# Altium PCB Fingerprint_Mechanism_PCB_V2.0.PcbDoc
Units mil, origin at the board's own origin, x right, y up, seen from the top; angles counter-clockwise.
Board outline 1800 x 4000 mil, 2 copper layers (Top Layer, Bottom Layer); 33 components, 22 nets, 111 pads, 13 vias.
Unrouted connection lines stored in the file: 1.
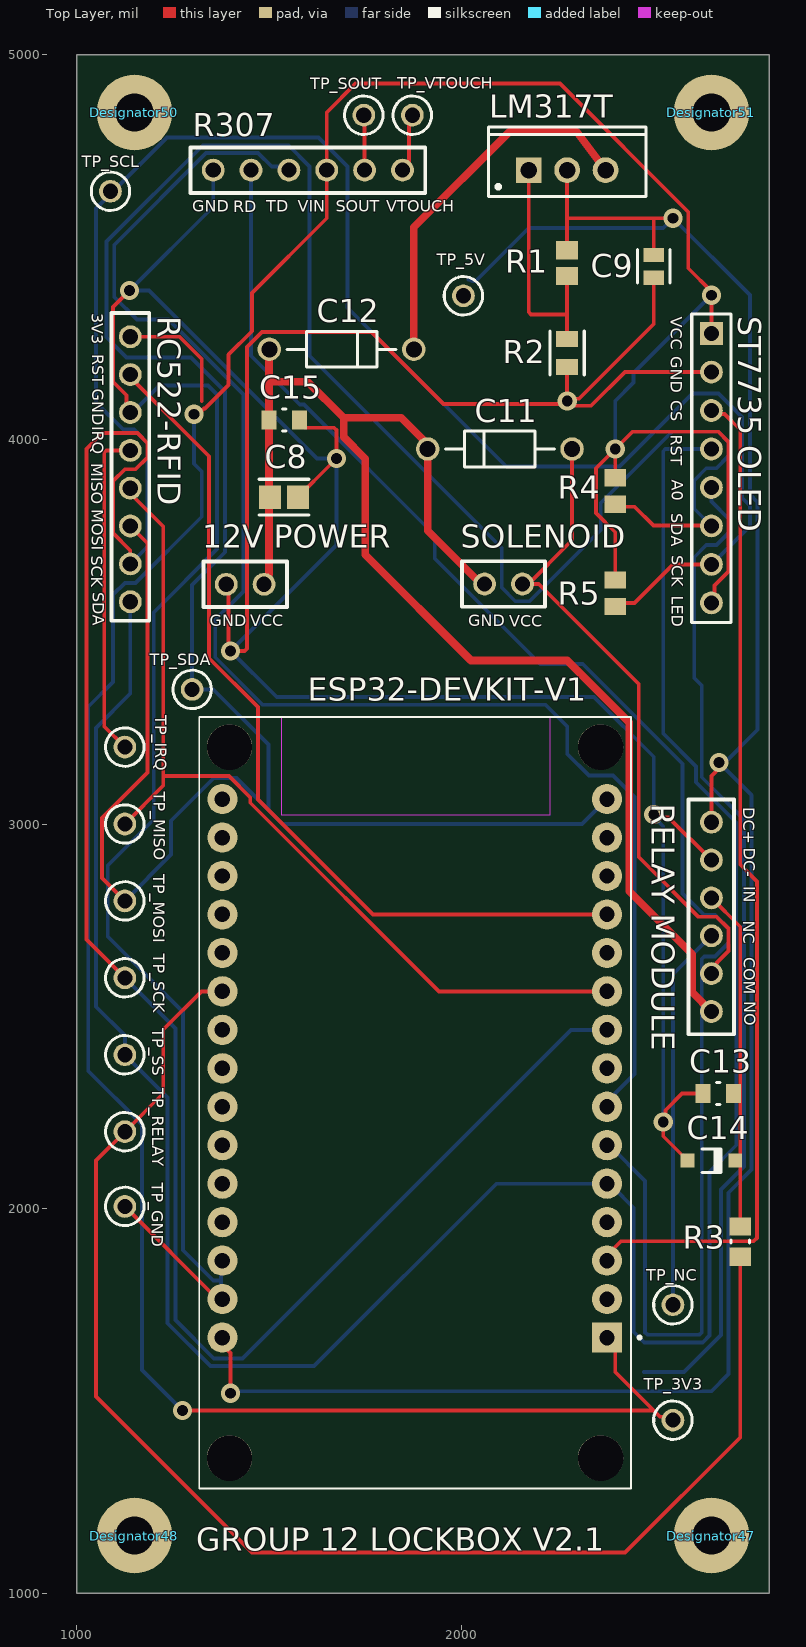
[diagram p0: Top Layer view]
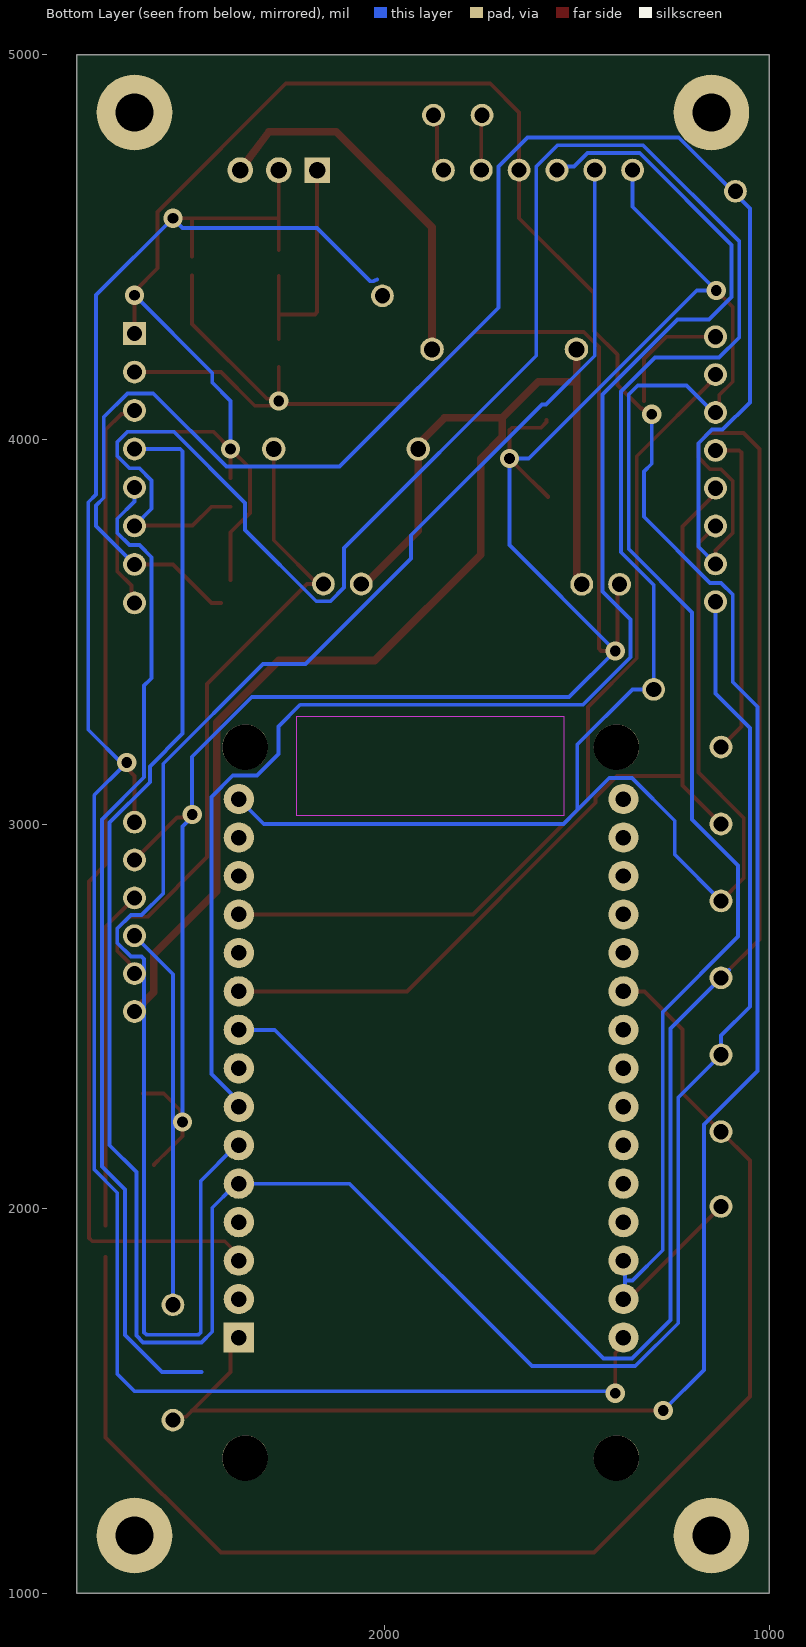
[diagram p1: Bottom Layer view, seen from below]

## Layer stack, top to bottom
Top Solder: solder mask 0.4, Solder Resist, Dk 3.5
Top Layer: signal copper 1.4
Dielectric 1: dielectric 12.6, FR-4, Dk 4.8
Bottom Layer: signal copper 1.4
Bottom Solder: solder mask 0.4, Solder Resist, Dk 3.5

## Board outline
1000,1000 1000,5000 2800,5000 2800,3200 2800,1000

## Design rules (kind name [scope] priority, off if disabled: settings)
Clearance [All] p1: gap=10 ignorepadtopadclearanceinfootprint=FALSE
PolygonConnect [All] p1: connectstyle=Relief reliefconductorwidth=10 reliefentries=4 polygonreliefangle="90 Angle" airgapwidth=10
RoutingVias [All] p1: holewidth=28 width=50 viastyle="Through Hole" minholewidth=28 minwidth=50 maxholewidth=28 maxwidth=50
SolderMaskExpansion [All] p1: expansion=4 istentingtop=FALSE
SupplyNets "Schematic Supply Nets_1" [InNet('GND')] p1: voltage=0.000
SupplyNets "Schematic Supply Nets" [InNet('24V VCC')] p2: voltage=0.000
Width [All] p1: maxlimit=10 minlimit=10 preferedwidth=10
30 further rules are at their usual default settings.

## Components (designator, comment, footprint, x,y, rotation, side; value= is the part's Value field where it differs from the comment)
C8 "Comment" FP-GRM21B-0_2-e0_2_0_7-IPC_A 1538.55,3850 r0 top
C9 "Comment" FP-C0805C-DG-MFG 2500,4450 r90 top
C11 "Comment" ONSC-AXIAL_LEAD-2-59-10_P 2100,3975 r0 top
C12 "Comment" ONSC-AXIAL_LEAD-2-59-10_P 1688.56,4234.1 r180 top
C13 "Comment" FP-0805-L_2_01_0_2-W_1_25-MFG 2667.72,2298.86 r0 top
C14 "Comment" DIOD-SOD123-2_V 2650,2125 r0 top
C15 "Comment" FP-0805-L_2_01_0_2-W_1_25-MFG 1539.37,4050 r0 top
Designator47 "Comment" PTH-M2D5X5 2650,1150 r0 top
Designator48 "Comment" PTH-M2D5X5 1150,1150 r0 top
Designator50 "Comment" PTH-M2D5X5 1150,4850 r0 top
Designator51 "Comment" PTH-M2D5X5 2650,4850 r0 top
ESP32-DEVKIT-V1 "Comment" MODULE_ESP32_DEVKIT_V1 1878.64,2275.65 r180 top
LM317T "LM317T Voltage Regulator (5V)" TO-220 2275,4700 r0 top (schematic designator C5)
R1 "Comment" RESC2013X60X40NL20T25 2275,4458.46 r270 top
R2 "Comment" FP-RN73R2A-IPC_B 2275,4225 r270 top
R3 "Comment" RESC2013X60X35ML10T20 2725,1914.37 r90 top
R4 "Comment" RESC2013X70X40NL20T20 2400,3865.55 r270 top
R5 "Comment" RESC2013X70X40NL20T20 2400,3600 r270 top
"ST7735 OLED" "Comment" RFID-RC522 2650,3925 r270 top
TP_3V3 "Comment" KSTN-5003 2550,1450 r0 top
TP_5V "Comment" KSTN-5003 2005.33,4373.32 r0 top
TP_GND "Comment" KSTN-5003 1125,2005.76 r270 top
TP_IRQ "Comment" KSTN-5003 1125,3200 r270 top
TP_MISO "Comment" KSTN-5003 1125,3000 r270 top
TP_MOSI "Comment" KSTN-5003 1125,2800 r270 top
TP_NC "Comment" KSTN-5003 2550,1750 r270 top
TP_RELAY "Comment" KSTN-5003 1125,2200 r270 top
TP_SCK "Comment" KSTN-5003 1125,2600 r270 top
TP_SCL "Comment" KSTN-5003 1087.55,4645.15 r0 top
TP_SDA "Comment" KSTN-5003 1300,3350 r0 top
TP_SOUT "Comment" KSTN-5003 1746.33,4842.84 r0 top
TP_SS "Comment" KSTN-5003 1125,2400 r270 top
TP_VTOUCH "Comment" KSTN-5003 1872.52,4842.84 r0 top

## Footprints (in the part's own frame and the unit in brackets; to place one, negate y for a bottom-side part, rotate by r counter-clockwise, add the part's x,y. Pads: shape width x height; smd on the part's side, far side on the other; paste and mask are expansions set on the pad)
DIOD-SOD123-2_V [mm] "SOD123, 2-Leads, Body 2.7x1.55mm, Height 1.45mm"
  rect 0.9x0.95 smd: 1(-1.575,0) 2(1.575,0)
  silkscreen extent -0.64,-0.82 0.64,0.77, body extent -1.35,-0.77 1.35,0.77, height 1.45
FP-0805-L_2_01_0_2-W_1_25-MFG [mm]
  rect 1x1.25 smd paste+0 mask+0: 1(-1,0) 2(1,0)
  silkscreen extent -0.13,-0.72 0.13,0.72, body extent -1.6,-0.82 1.6,0.82, height 0.25
FP-C0805C-DG-MFG [mm]
  rect 0.95x1.35 smd paste+0 mask+0: 1(-0.75,0) 2(0.75,0)
  silkscreen extent -1.11,-1.08 1.1,1.07, body extent -1.4,-0.85 1.4,0.85, height 0.25
FP-GRM21B-0_2-e0_2_0_7-IPC_A [mil]
  rect 57.27x61.27 smd paste+0 mask+0: 1(-36.45,0) 2(36.45,0)
  silkscreen extent -65,-46 65,46, body extent -85,-50 85,50, height 10
FP-RN73R2A-IPC_B [mil]
  rect 41.54x57.33 smd paste+0 mask+0: 1(-36.44,0) 2(36.44,0)
  silkscreen extent -57,-44 57,44, body extent -67,-39 67,39, height 10
KSTN-5003 [mm] "Test Point, Through Hole, Dia 2.54mm"
  round 1.5 hole 1: 1(0,0)
  silkscreen extent -1.27,-1.27 1.27,1.27, body extent -1.27,-1.27 1.27,1.27, height 4.57
MODULE_ESP32_DEVKIT_V1 [mm]
  rect 2x2 / inner round 2 / far side rect 2x2 hole 1.02: 1(-12.7,15.515)
  round 2 hole 1.02: 2(-12.7,12.975) 3(-12.7,10.435) 4(-12.7,7.895) 5(-12.7,5.355) 6(-12.7,2.815) 7(-12.7,0.275) 8(-12.7,-2.265) 9(-12.7,-4.805) 10(-12.7,-7.345) 11(-12.7,-9.885) 12(-12.7,-12.425) 13(-12.7,-14.965) 14(-12.7,-17.505) 15(-12.7,-20.045) 16(12.7,-20.045) 17(12.7,-17.505) 18(12.7,-14.965) 19(12.7,-12.425) 20(12.7,-9.885) 21(12.7,-7.345) 22(12.7,-4.805) 23(12.7,-2.265) 24(12.7,0.275) 25(12.7,2.815) 26(12.7,5.355) 27(12.7,7.895) 28(12.7,10.435) 29(12.7,12.975) 30(12.7,15.515)
  round 3 hole 3 unplated: ""(-12.28,23.475) ""(-12.28,-23.475) ""(12.23,23.475) ""(12.23,-23.475)
  Keep-Out Layer region: 8.78,-25.475 -8.91,-25.475 -8.91,-18.985 8.78,-18.985
  Keep-Out Layer region: 8.78,-25.475 -8.91,-25.475 -8.91,-18.985 8.78,-18.985
  silkscreen extent -14.95,-25.48 14.23,25.48
ONSC-AXIAL_LEAD-2-59-10_P [mm] "AXIAL, 2-Leads, Diameter 2.35mm"
  round 1.55 hole 1.05: 1(-4.77,0) 2(4.77,0)
  silkscreen extent -3.59,-1.17 3.59,1.17
PTH-M2D5X5 [mm]
  round 5 hole 2.5: 1(0,0)
RESC2013X60X35ML10T20 [mm] "Chip Resistor, 2-Leads, Body 2.1x1.35mm, IPC Low Density"
  rect 1.2x1.45 smd: 1(-1,0) 2(1,0)
  silkscreen extent -0.1,-0.63 0.1,0.63, body extent -1.05,-0.68 1.05,0.67, height 0.6
RESC2013X60X40NL20T25 [mm] "Chip Resistor, 2-Leads, Body 2.00x1.25mm, IPC Medium Density"
  rect 1.2x1.45 smd: 1(-0.85,0) 2(0.85,0)
  body extent -1.1,-0.72 1.1,0.72, height 0.6
RESC2013X70X40NL20T20 [mm] "Chip Resistor, 2-Leads, Body 2.2x1.35mm, IPC Medium Density"
  rect 1.15x1.45 smd: 1(-0.875,0) 2(0.875,0)
  body extent -1.1,-0.72 1.1,0.72, height 0.7
RFID-RC522 [mm]
  rect 1.508x1.508 / inner round 1.508 / far side rect 1.508x1.508 hole 1: 1(-8.89,0)
  round 1.508 hole 1: 2(-6.35,0) 3(-3.81,0) 4(-1.27,0) 5(1.27,0) 6(3.81,0) 7(6.35,0) 8(8.89,0)
  silkscreen extent -10.19,-1.3 10.19,1.3
TO-220 [mm] "TO, Thru-Hole, Vertical, Heatsink Mounted; 3 In-Line Leads; Pitch 2.54 mm"
  rect 1.7x1.7 hole 1.1: 1(-2.54,0)
  round 1.7 hole 1.1: 2(0,0) 3(2.54,0)
  silkscreen extent -5.2,-1.75 5.2,2.85, body extent -5.25,-1.8 5.25,2.9, height 19.7

## Part data
LM317T: library part CMP-0244-00444-1, "1.5A, 1.2V to 37V Adjustable Voltage Regulator, 3-Pin TO-220", ComponentLink1Description="Manufacturer URL", ComponentLink1URL=http://www.st.com, ComponentLink2Description=Datasheet, ComponentLink2URL=http://www.st.com/internet/com/TECHNICAL_RESOURCES/TECHNICAL_LITERATURE/DATASHEET/CD00000455.pdf, ComponentLink3Description="Package Specification", ComponentLink3URL=http://www.st.com/internet/com/TECHNICAL_RESOURCES/TECHNICAL_LITERATURE/PACKAGE_INFORMATION/CD00004649.pdf, DatasheetVersion=1/11/2011, PackageDescription="TO, Thru-Hole, Vertical, Heatsink Mounted; 3 In-Line Leads; Pitch 2.54 mm", PackageReference=TO-220, PackageVersion=2011

## Free pads (board coordinates)
  round 59.37 hole 39.37: ""(1139.18,3577.83) ""(1139.18,3676.26) ""(1139.18,3774.68) ""(1139.18,3873.11) ""(1139.18,3971.53) ""(1139.18,4069.96) ""(1139.18,4168.38) ""(1139.18,4266.81) ""(1354.72,4700) ""(1388.71,3623.23) ""(1453.15,4700) ""(1487.13,3623.23) ""(1551.57,4700) ""(1650,4700) ""(1748.43,4700) ""(1846.85,4700) ""(2060.29,3624) ""(2158.72,3624) ""(2650,2512.59) ""(2650,2611.02) ""(2650,2709.44) ""(2650,2807.87) ""(2650,2906.29) ""(2650,3004.72)

## Via types
v1: diameter 50, hole 28, Top Layer to Bottom Layer, 13 vias

## Nets (pads, with @x,y where several pads share a name; then routed paths per layer and width w, separated by ;. In a path a pad name is that pad's centre, name@x,y a point inside that pad or via, vN(x,y) a via of type N, cw(c..) or ccw(c..) an arc to the next point about the centre after c; other vN are vias at no path point)
3V3:  | length 6797
  Top Layer w10: v1(1275,1475) 2500,1475 ; v1(1305,4065.36) 1315.82,4065.36 1330.46,4080 1333.28,4080 1394.27,4140.99 1394.27,4220.25 1455.25,4281.23 1455.25,4380.25 1650,4575 1650,4850 1725,4925 2256.57,4925 2590,4591.57 2590,4444.86 2650,4384.86 v1(2650,4375) ; v1(2400,3975) 2444.68,4019.68 ; 2650,4275 v1@2650,4373
  Bottom Layer w10: v1(1275,1475) 1169.53,1580.47 1169.53,2218.44 1030,2357.97 1030,3305 1094.5,3369.5 1094.5,3596.34 1125.2,3627.04 1153.17,3627.04 1325,3798.88 1325,3916.71 1305,3936.71 v1(1305,4065.36) ; 2447.79,4172.79 v1(2650,4375)
5V:  | length 5117.9
  Bottom Layer w10: v1(1400.04,1519.85) 1405.2,1525 2650,1525 2694.69,1569.69 2694.69,2041.4 2754.68,2101.4 2754.68,3074.94 v1@2677.31,3152.31 ; 2018.59,4415.83 cw(c2005.33,4373.32) 2029.1,4410.97 2035.97,4410.97 2175,4550 2525,4550 v1(2550,4575) 2750,4375 2750,3856.57 2770,3836.57 2770,3245 v1@2677.31,3152.31 ; v1(2669.97,3159.66) v1@2677.31,3152.31
"24V VCC": 
GND: 
NetC0_2: 
NetC0_13: 
NetC0_23: 
NetC0_24: 
NetC0_26: 
NetC0_29: 
NetC0_30: 
NetC0_31: 
NetC0_33: 
NetC0_34: 
NetC0_35: 
NetC0_37: 
NetC2_3: LM317T.2 | length 208.1
  Top Layer w10: 2275,4491.93 LM317T.2
NetC4_1: 
NetC4_2: 
NetC4_3: 
NetC5_1: LM317T.1 | length 471.6
  Top Layer w10: LM317T.1 2175,4330.86 2180.86,4325 2275,4325
NetC5_3: LM317T.3 | length 125
  Top Layer w20: 2300,4800 LM317T.3
pads on no net: "ST7735 OLED.1" "ST7735 OLED.2" "ST7735 OLED.3" "ST7735 OLED.4" "ST7735 OLED.5" "ST7735 OLED.6" "ST7735 OLED.7" "ST7735 OLED.8" C8.1 C8.2 C9.1 C9.2 C11.1 C11.2 C12.1 C12.2 C13.1 C13.2 C14.1 C14.2 C15.1 C15.2 Designator47.1 Designator48.1 Designator50.1 Designator51.1 ESP32-DEVKIT-V1. ESP32-DEVKIT-V1.1 ESP32-DEVKIT-V1.2 ESP32-DEVKIT-V1.3 ESP32-DEVKIT-V1.4 ESP32-DEVKIT-V1.5 ESP32-DEVKIT-V1.6 ESP32-DEVKIT-V1.7 ESP32-DEVKIT-V1.8 ESP32-DEVKIT-V1.9 ESP32-DEVKIT-V1.10 ESP32-DEVKIT-V1.11 ESP32-DEVKIT-V1.12 ESP32-DEVKIT-V1.13 ESP32-DEVKIT-V1.14 ESP32-DEVKIT-V1.15 ESP32-DEVKIT-V1.16 ESP32-DEVKIT-V1.17 ESP32-DEVKIT-V1.18 ESP32-DEVKIT-V1.19 ESP32-DEVKIT-V1.20 ESP32-DEVKIT-V1.21 ESP32-DEVKIT-V1.22 ESP32-DEVKIT-V1.23 ESP32-DEVKIT-V1.24 ESP32-DEVKIT-V1.25 ESP32-DEVKIT-V1.26 ESP32-DEVKIT-V1.27 ESP32-DEVKIT-V1.28 ESP32-DEVKIT-V1.29 ESP32-DEVKIT-V1.30 R1.1 R1.2 R2.1 R2.2 R3.1 R3.2 R4.1 R4.2 R5.1 R5.2 TP_3V3.1 TP_5V.1 TP_GND.1 TP_IRQ.1 TP_MISO.1 TP_MOSI.1 TP_NC.1 TP_RELAY.1 TP_SCK.1 TP_SCL.1 TP_SDA.1 TP_SOUT.1 TP_SS.1 TP_VTOUCH.1
copper on no net: | length 68114.4
  Top Layer w10: 1116.38,3783.19 1125.2,3774.37 1125.2,3762.49 1129.74,3757.95 1129.74,3751.88 ; 1121.6,2603.4 1025,2700 1025,3975 1066.22,4016.22 1157.69,4016.22 1183.87,3990.04 1183.87,3953.02 1153.17,3922.32 1125.2,3922.32 1094.5,3891.62 1094.5,3756.17 1139.18,3711.49 1139.18,3676.26 1129.74,3685.7 ; 1125,2005.76 1365.38,1765.38 ; 1125,2800 1065.87,2859.13 1065.87,3015.87 1183.87,3133.87 1183.87,3730 1139.18,3774.68 ; 1125,3000 1225,3100 1225,3125 ; 1125,3200 1071.53,3253.47 1071.53,3965.67 1077.39,3971.53 1139.18,3971.53 ; 1129.74,3587.28 1139.18,3577.83 ; 1129.74,4177.83 1139.18,4168.38 ; 1135.4,4164.6 1344.02,3955.98 1344.02,3430.98 1471.2,3303.8 1471.2,3063.65 1770.03,2764.82 2378.64,2764.82 ; v1(1137.36,4386.87) 1094.5,4344.01 1094.5,4149.87 1129.74,4114.63 1129.74,4079.4 1139.18,4069.96 ; 1139.18,4266.81 1266.81,4266.81 1325,4208.62 1325,4100 ; 1148.63,3863.66 1139.18,3873.11 1139.18,3859.75 1225,3773.93 1225,3125 ; 1224.85,2465.4 1324.27,2564.82 1378.64,2564.82 ; 1225,2465.25 1225,2300 1125,2200 1050,2125 1050,1511.25 1455.62,1105.62 2425.42,1105.62 2725,1405.2 2725,1875 ; 1369.02,3630.98 1388.93,3611.07 1394.35,3605.65 1394.35,3455.65 v1(1400,3450) 1436.59,3450 1442.45,3455.86 1442.45,4240.14 1481.91,4279.61 1766.48,4279.61 1953.75,4092.35 2267.35,4092.35 v1(2275,4100) 2275,4188.56 ; 1375,1861.18 1378.64,1864.82 ; 1378.64,1664.82 1378.64,1646.22 1400,1624.86 1400,1527.49 ; 1388.71,3623.23 1400,3611.94 ; 1487.13,3623.23 1487.13,3636.59 1500,3649.45 ; 1578.74,4050 1578.74,4045.08 1593.43,4030.39 1669.14,4030.39 1675,4024.54 v1(1675,3950) ; 1598.63,3875.63 1575,3852 1575,3850 v1@1660.27,3935.27 ; 1748.43,4700 1748.43,4849.48 ; 1863.36,4688.13 1863.36,4837.6 ; 1912.2,3960.96 1912.2,3975 ; 1912.29,3975 1912.29,3984.92 ; 2158.72,3624 2201,3624 2461.16,3363.84 2461.16,2913.84 2616.34,2758.66 2663.98,2758.66 2694.69,2727.95 2694.69,2669.69 2664.61,2639.61 2664.61,2638.99 2650.62,2625 2650,2625 ; 2166.36,3616.36 2287.8,3737.8 2287.8,3975 ; 2275,4261.44 2275,4425 ; 2275,4575 2500,4575 ; 2373.32,1873.32 2415.12,1915.12 2759.76,1915.12 2768.54,1923.9 2768.54,2850.95 2725,2894.49 2725,4025 2684.1,4065.9 2672.81,4065.9 2666.35,4072.36 2666.35,4083.65 ; 2378.64,1664.82 2400,1643.46 2400,1575 2516.01,1458.99 2541.01,1458.99 2550,1450 ; 2378.64,2564.82 1941.74,2564.82 1451.2,3055.36 1451.2,3069.15 1395.36,3125 1225,3125 ; 2400,3634.45 2400,3758.71 2350,3808.71 2350,3925 2400,3975 2400,3900 ; 2400,3825 2450,3825 2499.2,3775.8 2649.2,3775.8 2650,3775 ; 2425,3575 2450,3575 2550,3675 2650,3675 ; 2444.68,4019.69 2668.51,4019.69 2694.69,3993.51 2694.69,3656.49 2657.88,3619.69 2657.88,3582.88 2650,3575 ; v1(2500,3025) 2507.65,3017.35 2538.95,3017.35 2650,2906.29 ; 2500,4426.94 2500,4300 2305.78,4105.78 2293.48,4105.78 2287.37,4099.68 2287.37,4087.37 2337.37,4087.37 2425,4175 2650,4175 ; 2500,4475.87 2500,4575 ; 2530,4575 2500,4575 ; 2599.51,2113.48 2599.51,2114.46 2575.28,2138.7 2574.29,2138.7 2525,2187.99 v1(2525,2225) 2530.78,2230.78 2530.78,2255.78 2573.86,2298.86 2628.35,2298.86 ; 2650,2807.87 2725,2732.87 2725,2125 2725,1956.19 ; 2650,3004.72 2650,3125 2675,3150
  Top Layer w20: 1500,3649.45 1500,3850 1500,4050 1500,4150 ; 1500,4209.35 1500,4150 ; 1876.36,4234.1 1876.36,4551.36 2125,4800 2300,4800 ; 1912.2,3960.96 1912.2,3762.8 2055.65,3619.35 ; 1915.08,3984.92 1843.75,4056.25 1693.75,4056.25 ; 2650,2512.59 2600,2562.59 2600,2661.02 2436.16,2824.86 2436.16,3263.84 2275,3425 2025,3425 1750,3700 1750,3950 1693.75,4006.25 1693.75,4056.25 ; 1500,4150 1600,4150 1693.75,4056.25
  Bottom Layer w10: 1104.55,2620.45 1125,2600 1256.3,2468.7 1256.3,1710.27 1356.12,1610.45 1430.9,1610.45 2285.27,2464.82 2378.64,2464.82 ; 1124.21,2400.79 1236.3,2288.7 1236.3,1701.99 1347.84,1590.45 1616.75,1590.45 2091.12,2064.82 2378.64,2064.82 2368.47,2075 ; 1125,2409.02 1125,2450 1050,2525 1050,3250 1139.18,3339.18 1139.18,3577.83 ; 1125,2800 1245.25,2920.25 1245.25,3008.33 1356.12,3119.19 1415.66,3119.19 1498.72,3036.13 ; v1(1137.36,4386.87) 1188.13,4386.87 1625,3950 v1(1675,3950) 1675,3747.9 1675,3725 v1(1400,3450) 1519.89,3330.11 2344.89,3330.11 2500,3175 v1(2500,3025) 2500,3018.43 2525,2993.43 v1(2525,2225) ; v1@1137.5,4387.5 1354.72,4604.72 1354.72,4700 ; 1139.18,3676.26 1183.87,3720.94 1183.87,3990.04 1148.64,4025.27 1120.68,4025.27 1050,4095.95 1050,4600 1083.77,4633.77 1234.68,4784.68 1319.65,4784.68 1628.51,4784.68 1703.74,4709.45 1703.74,4342.35 2116.6,3929.49 2411.06,3929.49 2601.25,4119.68 2668.51,4119.68 2730,4058.19 2730,3848.28 2750,3828.28 2750,3775 2650,3675 ; 1142.07,4067.07 1215,4140 1341.57,4140 1365,4116.57 1365,3715 1200,3550 1200,3012.03 1080.47,2892.5 1080.47,2707.5 1276.3,2511.67 1276.3,1891.7 1355,1813 1375,1813 ; 1300,3327.47 1300,3621.72 1385,3706.72 1385,4124.85 1296.79,4213.07 1129.73,4213.07 1077.37,4265.43 1077.37,4514.12 1327.93,4764.68 1550.08,4764.68 1605.31,4709.45 1605.31,4217.53 2104.98,3717.87 2104.98,3614.54 2140.21,3579.31 2177.23,3579.31 2362.24,3764.33 2362.24,3834.67 2547.26,4019.68 2668.51,4019.68 2694.68,3993.51 2694.68,3956.49 2663.19,3925 2636.81,3925 2605.31,3893.51 2605.31,3819.69 2650,3775 ; 1300,3350 1355,3350 1498.72,3206.28 1498.72,3036.13 ; 1375,1764.82 1375,1861.18 1378.64,1864.82 ; 1453.15,4700 1453.15,4217.35 1579.59,4090.91 1590.66,4090.91 1930.82,3750.74 1930.82,3690.27 2205.17,3415.92 2315.65,3415.92 2575,3156.57 2575,2819.68 2631.49,2763.18 2659.45,2763.18 2694.68,2727.95 2694.68,2690.94 2659.45,2655.7 2631.49,2655.7 2625,2649.21 2625,2611.02 2625,2512.59 2625,1678.11 2619.14,1672.25 2483.61,1672.25 2477.75,1678.11 2477.75,2072.25 2388.29,2161.71 ; 1551.57,4700 1542.13,4709.45 1506.9,4709.45 1471.66,4744.68 1336.22,4744.68 1097.36,4505.83 1097.36,4370.3 1156.18,4311.49 1238.51,4311.49 1433.39,4116.61 1433.39,3604.72 1360,3531.33 1360,3433.43 1483.33,3310.11 2219.14,3310.11 2275.29,3253.96 2275.29,3181.95 2331.43,3125.81 2394.55,3125.81 2450,3070.36 2450,2350 2391.32,2291.32 ; 2386.46,3072.64 2313.82,3000 1534.85,3000 1498.72,3036.13 ; 2393.99,2056.01 2447.84,2002.16 2447.84,1679.73 2475.33,1652.25 2627.43,1652.25 2645,1669.82 2645,2095 2714.68,2164.68 2714.68,3003.75 2610,3108.43 2610,3149.85 2525,3234.85 2525,3969.14 2530.86,3975 2650,3975 ; 2400,3975 2400,4100 2447.79,4147.79 2447.79,4172.79 ; 2475,1575 2578.46,1575 2674.69,1671.22 2674.69,2049.69 2734.68,2109.68 2734.68,3012.03 2625,3121.72 2625,3359.97 2609.97,3375 2605.31,3379.66 2605.31,3693.51 2636.81,3725 2663.19,3725 2694.69,3756.49 2694.69,3793.51 2650,3838.19 2650,3875 2659.1,3865.9 ; 2550,1726 2550,2609.44 2645.28,2704.72 ; 2642.12,3582.88 2650,3575

## Silkscreen, mask and mechanical layers (free items; w line width, h text height)
Top Overlay:
  lines w10: 1089.97,3528.62 1089.97,4328.58 1188.4,4328.58 1188.4,3528.62 1089.97,3528.62 ; 1295.67,4640.94 1905.91,4640.94 1905.91,4759.06 1295.67,4759.06 1295.67,4640.94 ; 1329.65,3564.17 1546.19,3564.17 1546.19,3682.28 1329.65,3682.28 1329.65,3564.17 ; 2001.24,3564.94 2217.77,3564.94 2217.77,3683.05 2001.24,3683.05 2001.24,3564.94 ; 2590.94,2453.54 2590.94,3063.78 2709.06,3063.78 2709.06,2453.54 2590.94,2453.54
  text "R307" at 1301.4,4788.2 h60
  text "VIN" at 1574,4592.07 h30
  text "SOUT" at 1673.39,4592.07 h30
  text "VTOUCH" at 1804.1,4591.8 h30
  text "GND" at 1300.69,4591.33 h30
  text "RD" at 1406.74,4590.84 h30
  text "TD" at 1492.48,4591.36 h30
  text "3V3" at 1038.71,4328.38 h30 r270
  text "RC522-RFID" at 1210,4320 h60 r270
  text "VCC" at 2544.62,4318.96 h30 r270
  text "RST" at 1040.47,4221.53 h30 r270
  text "GND" at 2544.32,4216.65 h30 r270
  text "GND" at 1040.47,4131.04 h30 r270
  text "CS" at 2544.84,4101.96 h30 r270
  text "IRQ" at 1040.47,4033.53 h30 r270
  text "RST" at 2544.32,4012.29 h30 r270
  text "MISO" at 1037.55,3938.37 h30 r270
  text "A0" at 2547.46,3895.1 h30 r270
  text "MOSI" at 1038.5,3818.11 h30 r270
  text "SDA" at 2545.35,3807.32 h30 r270
  text "SOLENOID" at 1997.92,3718.81 h60
  text "12V POWER" at 1326.34,3718.05 h60
  text "SCK" at 2546.75,3699.17 h30 r270
  text "SCK" at 1038.13,3697.82 h30 r270
  text "SDA" at 1041.05,3602.07 h30 r270
  text "LED" at 2547.46,3593.84 h30 r270
  text "GND" at 1345.74,3514.17 h30
  text "VCC" at 1451.3,3513.57 h30
  text "GND" at 2018.4,3513.5 h30
  text "VCC" at 2123.96,3512.91 h30
  text "RELAY MODULE" at 2495.58,3052.08 h60 r270
  text "DC+" at 2732.83,3042.98 h30 r270
  text "DC-" at 2734.22,2938.14 h30 r270
  text "IN" at 2734.22,2837.94 h30 r270
  text "NC" at 2733.3,2748.87 h30 r270
  text "COM" at 2734.22,2653.31 h30 r270
  text "NO" at 2736.08,2539.65 h30 r270
  text "GROUP 12 LOCKBOX V2.1" at 1310,1110 h60
Board Outline:
  the board outline again, w10